# Altium PCB roneCPUBoard-v15a.PcbDoc (part 3 of 3)
Units mil, origin at the board's own origin, x right, y up, seen from the top; angles counter-clockwise.
Board outline 3915.64 x 3915.87 mil, 2 copper layers (Top Layer, Bottom Layer), stack 61.2 mil thick; 219 components, 161 nets, 783 pads, 428 vias.
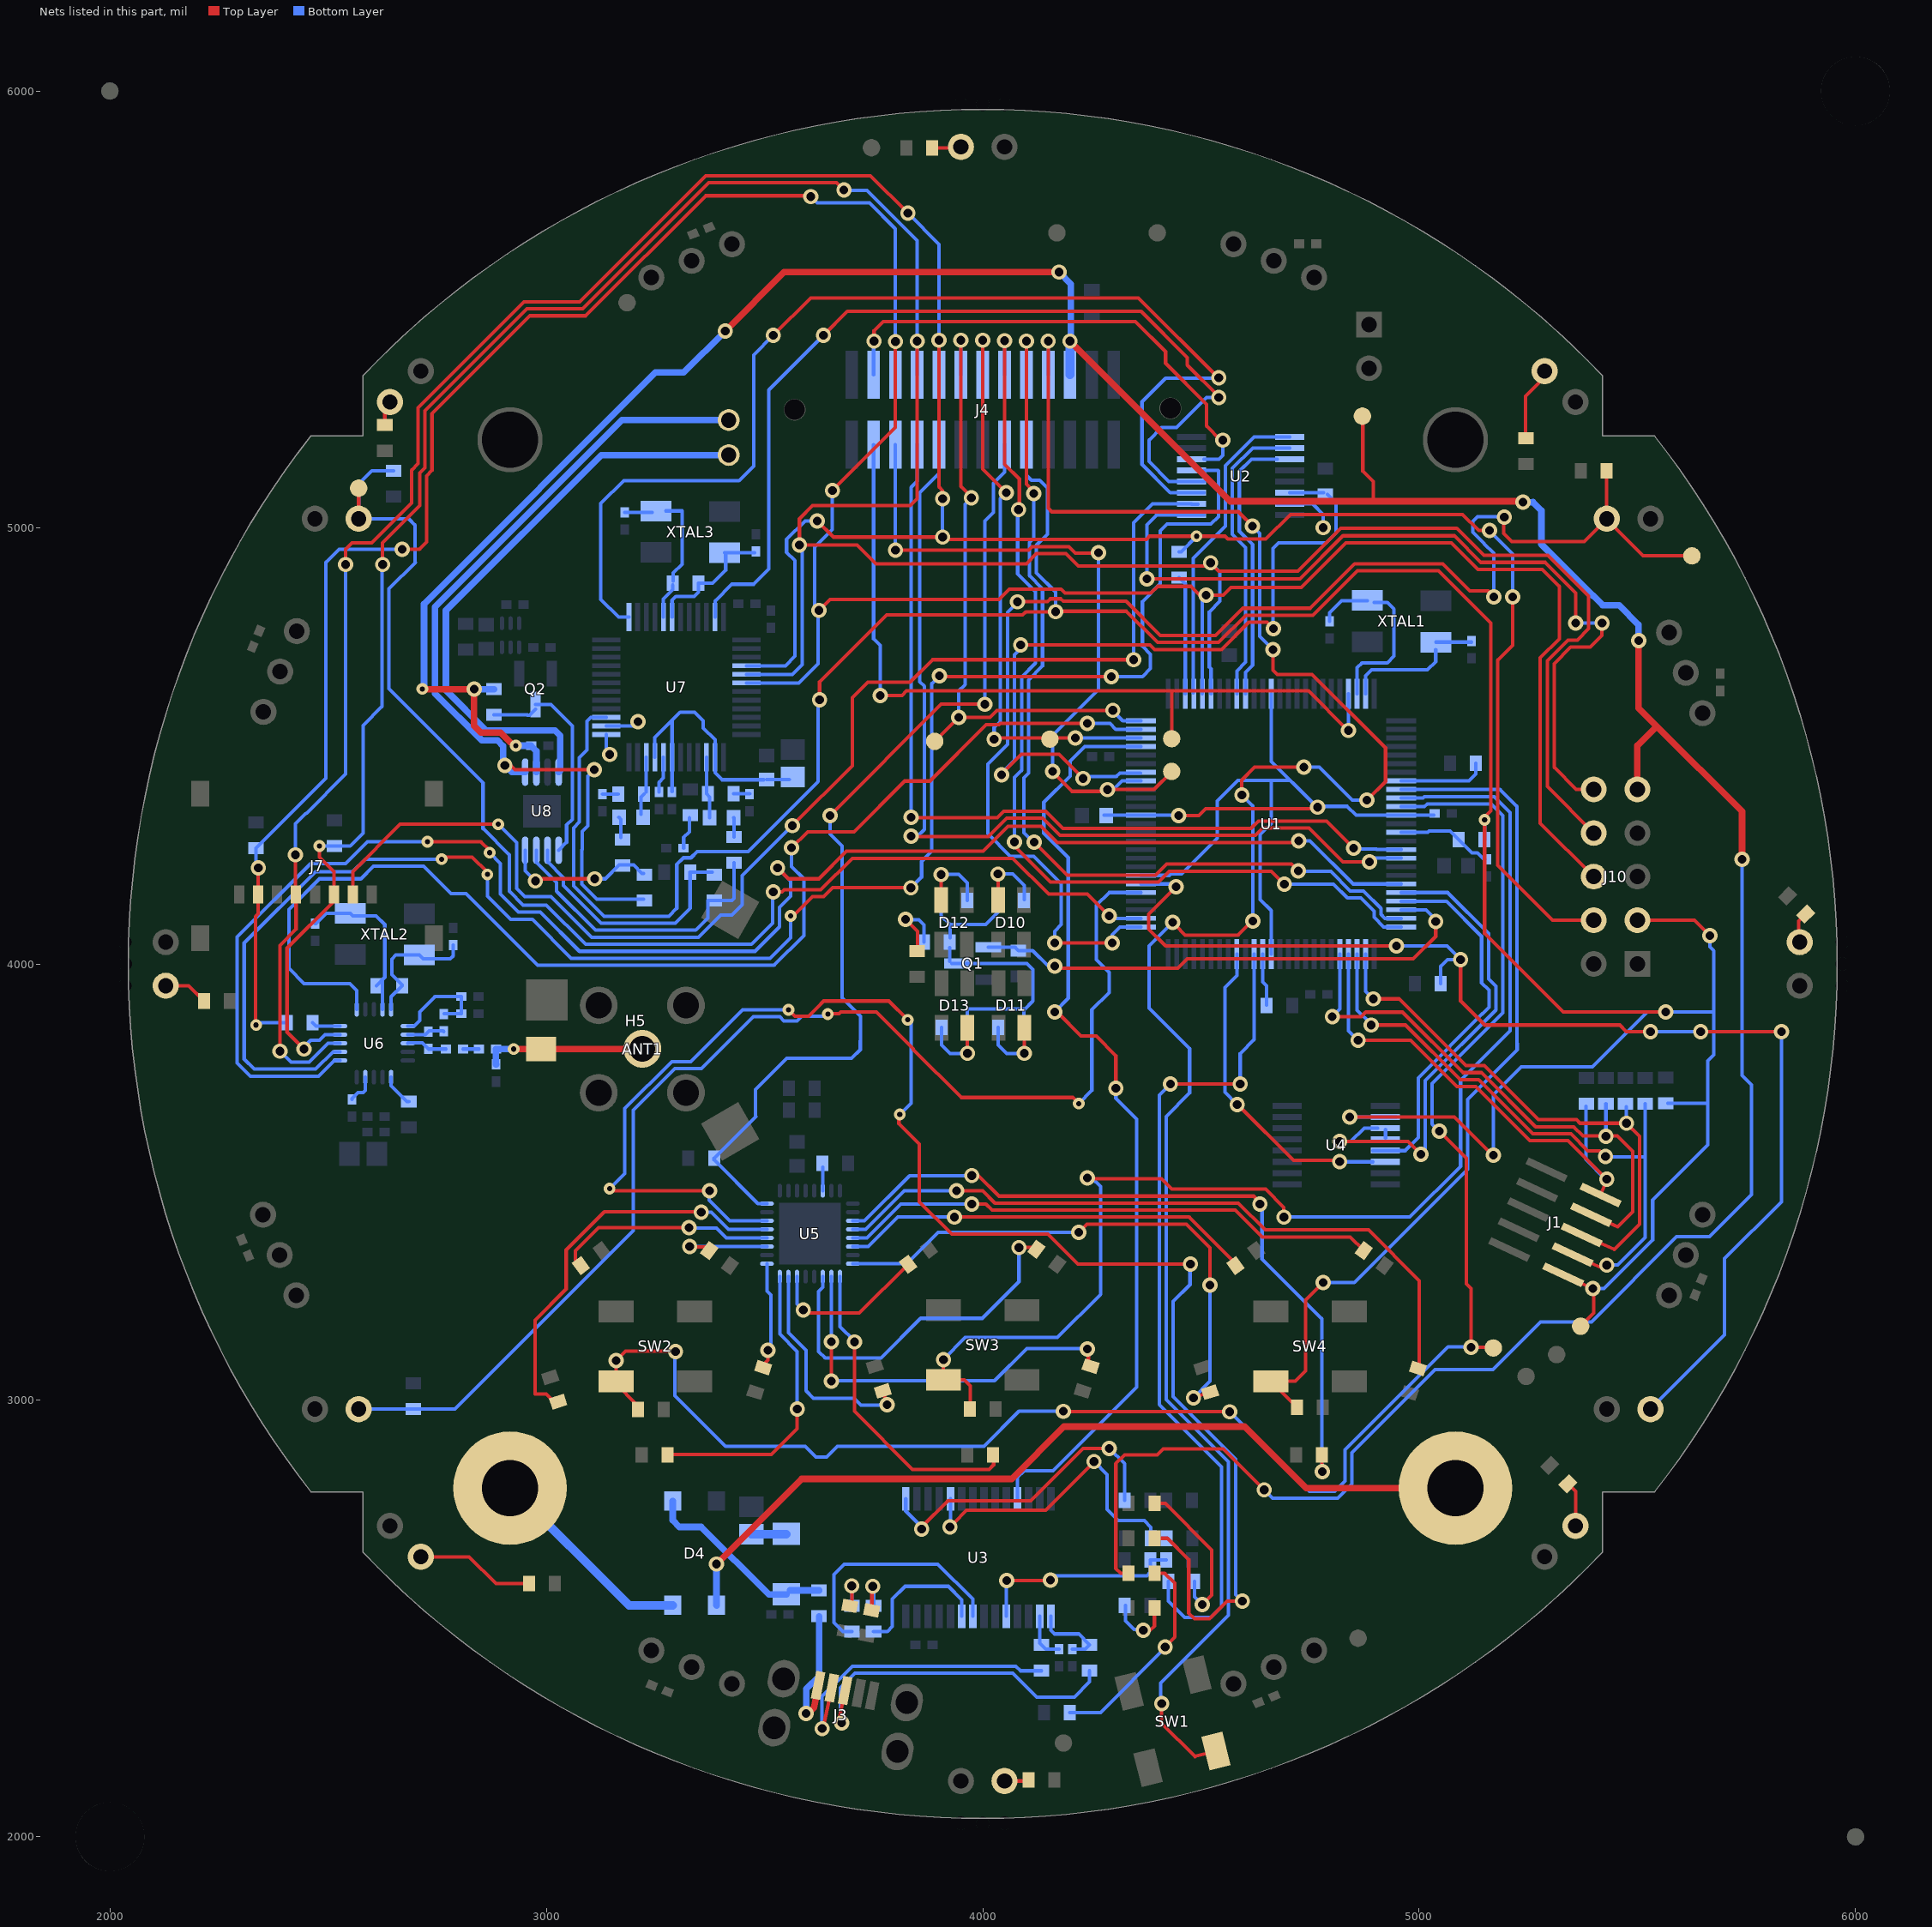
[diagram p3: the nets of this part, all layers, seen from the top]

## Via types
v1: diameter 35, hole 20, Top Layer to Bottom Layer, tented top, 333 vias
v2: diameter 27, hole 12, Top Layer to Bottom Layer, 65 vias
v3: diameter 35, hole 20, Top Layer to Bottom Layer, 14 vias
v4: diameter 25.98, hole 12.99, Top Layer to Bottom Layer, tented top, 13 vias
v5: diameter 25.98, hole 12.99, Top Layer to Bottom Layer, tented both sides, 3 vias

## Nets (pads, with @x,y where several pads share a name; then routed paths per layer and width w, separated by ;. In a path a pad name is that pad's centre, name@x,y a point inside that pad or via, vN(x,y) a via of type N, cw(c..) or ccw(c..) an arc to the next point about the centre after c; other vN are vias at no path point) (continued)
IR_XMIT_CLK: U1.71 U4.11 U4.12 | length 1134
  Top Layer w8: v1(4818,3593) 4975,3593 v1(5004,3564)
  Bottom Layer w8: v1(4818,3593) 4843,3593 4874,3624 U4.11@4905,3624 ; U4.12@4923,3601.13 U4.11@4923,3620.32 ; U1.71@4959.23,4163.52 5065.48,4163.52 5159,4070 5159,3966 5176,3949 5176,3894.37 5014,3732.37 5014,3577 v1@5006,3569
IR_XMIT_DATA: U1.92 U4.14 | length 716.5
  Top Layer w8: v1@4587,3675 4712,3550 v1@4815,3550
  Bottom Layer w8: U1.92@4582.26,4022.77 4582.26,3973.26 4555,3946 4555,3706 v1(4583,3678) ; v1@4824.61,3546.61 U4.14@4893.66,3546.61
  other v1: 4818,3547
IR_XMIT_PWM: U1.72 U4.13 | length 868.6
  Bottom Layer w8: U4.13@4893.66,3572.2 4968.2,3572.2 4998,3602 4998,3739 5144,3885 ; U1.72@4959.23,4143.83 5062.54,4143.83 5143,4063.37 5143,3957 5160,3940 5160,3901 5144.5,3885.5
JTAG_TCK: J1.4 R8.1 U1.80 | length 1287.5
  Top Layer w8: v1(4801,3879) 4867.28,3879 4877.78,3889.5 4962.13,3889.5 5100.63,3751 5142.88,3751 5266.88,3627 5354.25,3627 5375.25,3606 v1@5428,3606 ; J1.4@5394.03,3424.89 5455,3398 5489,3432 5489,3571 5454,3606 v1@5444,3606
  Bottom Layer w8: v1(4801,3879) 4818.48,3896.48 U1.80@4818.48,4022.77 ; v1(5428,3605) R8.1@5428,3679.47
JTAG_TDI: J1.8 R10.1 U1.78 | length 1422.4
  Top Layer w8: v1(4890,3860) 4969,3860 5094,3735 5136.25,3735 5260.25,3611 5347.63,3611 5386.63,3572 5414,3572 v1(5427,3559) ; J1.8@5351.43,3333.54 v1@5420,3303
  Bottom Layer w8: U1.78@4857.85,4022.77 4857.85,3894.15 v1@4890,3862 ; v1@5427,3558 5518,3558 ; v1(5430,3310) 5455,3310 5518,3373 5518,3558 ; R10.1@5518,3679.47 5518,3558
JTAG_TDO: J1.6 R9.1 U1.77 | length 1249.9
  Top Layer w8: v1(4895,3920) 4954.25,3920 5107.25,3767 5149.51,3767 5273.51,3643 5360.88,3643 5368.88,3635 v1@5472,3635 ; J1.6@5372.73,3379.22 5447,3346 5505,3404 5505,3605 v1(5475,3635)
  Bottom Layer w8: U1.77@4877.54,4022.77 4877.54,3937.46 v1(4895,3920) ; v1(5475,3635) R9.1@5475,3673
JTAG_TMS: J1.2 R7.1 U1.79 | length 1129.7
  Top Layer w8: v1(4860,3825) 4980.49,3825 5086.49,3719 5129.63,3719 5253.63,3595 5341,3595 v1@5429,3507 ; J1.2@5415.32,3470.56 v1@5430,3504
  Bottom Layer w8: U1.79@4838.17,4022.77 4838.17,3846.83 v1(4860,3825) ; R7.1@5382,3674 5382,3552 v1@5427,3507
  other v1: 5430,3507
LED_BLUE_0: D15.2 U5.3 | length 1688.7
  Top Layer w8: v1(3975,3515) 3990,3515 4037,3468 4621,3468 v1@4637,3452 ; v1@4777.53,2841.53 D15.2@4777.53,2869
  Bottom Layer w8: U5.3@3702.43,3411.53 3729.02,3411.53 3832.49,3515 v1(3975,3515) ; v1@4640,3438 4640,3324 4777,3187 v1@4777,2837.05
  other v1: 4778,2837 4635,3450
LED_BLUE_1: D16.2 U5.4 | length 1617.6
  Top Layer w8: v1(3940,3480) 4000,3480 4028,3452 4585.63,3452 4647.13,3390.5 4883.8,3390.5 5000,3274.3 D16.2@5000,3075.96
  Bottom Layer w8: U5.4@3702.43,3391.84 3731.96,3391.84 3820.12,3480 v1(3940,3480)
LED_BLUE_2: D17.2 U5.5 | length 1239.6
  Top Layer w8: v1(3975,3450) 4007.37,3450 4021.37,3436 4579,3436 4640.5,3374.5 4841.97,3374.5 D17.2@4873.11,3343.36
  Bottom Layer w8: U5.5@3702.43,3372.16 3734.9,3372.16 3812.75,3450 v1@3967.5,3450
LED_BLUE_3: D18.2 U5.6 | length 925.9
  Top Layer w8: v1@3947.63,3420 4473,3420 D18.2@4572,3321
  Bottom Layer w8: U5.6@3702.43,3352.47 3737.84,3352.47 3805.37,3420 v1(3935,3420)
LED_BLUE_4: D19.2 U5.8 | length 1277.9
  Top Layer w8: v1(4220,3385) 4239,3404 4466.37,3404 4521,3349.37 v1(4521,3264) ; v1@4483,3007 D19.2@4521.12,3018.92
  Bottom Layer w8: U5.8@3702.43,3313.1 3826.1,3313.1 3898,3385 v1(4220,3385) ; v1(4483,3006) 4521,3044 v1(4521,3264)
LED_GREEN_0: D20.2 U5.9 | length 720.5
  Top Layer w8: v1(3706,3134) 3706,2975 3839,2842 4015,2842 4025,2852 D20.2@4025,2874
  Bottom Layer w8: U5.9@3672.9,3283.57 3672.9,3169.1 v1@3706,3136
LED_GREEN_1: D21.2 U5.10 | length 895.1
  Top Layer w8: v1@3653,3045 v1@3653,3134.21 ; D21.2@4242.12,3079.08 v1@4242.12,3118
  Bottom Layer w8: v1@3653,3045 4027,3045 4101,3119 v1@4240,3119 ; v1(3653.21,3134.21) U5.10@3653.21,3283.57
  other v1: 3653,3044 4240,3118
LED_GREEN_2: D22.2 U5.11 | length 819.5
  Top Layer w8: v1@4084,3351 D22.2@4112,3351
  Bottom Layer w8: U5.11@3633.53,3283.57 3633.53,3259.32 3623.71,3249.5 3623.71,3112.29 3639,3097 3767,3097 3858,3188 3999,3188 4083,3272 v1(4083,3350)
LED_GREEN_3: D23.2 U5.14 | length 363.2
  Top Layer w8: v1@3595,3200 3717.47,3200 D23.2@3829.11,3311.64
  Bottom Layer w8: U5.14@3574.47,3283.57 3574.47,3220.53 v1@3588.5,3206.5
  other v1: 3589,3207
LED_GREEN_4: D24.2 U5.15 | length 510.5
  Top Layer w8: D24.2@3771,3021 v1(3781,2990)
  Bottom Layer w8: U5.15@3554.79,3283.57 3554.79,3154.84 3595,3114.63 3595,3022 3612,3005 3705,3005 3721,2989 v1@3781,2989
LED_HEARTBEAT: R5.2 U1.90 | length 1931.1
  Top Layer w8: v1(4430,3725) v1(4590,3725)
  Bottom Layer w8: R5.2@4425,2585 4425,2540 4462.5,2502.5 4522.5,2502.5 4547,2527 4547,2848 4404.5,2990.5 4404.5,3699.5 v1(4430,3725) ; v1(4590,3725) 4590,3795 4621.63,3826.63 U1.90@4621.63,4022.77
LED_IR_BEACON: Q1.1 R33.2 U1.73 | length 1202.7
  Top Layer w8: v1@4165,4000 4175,3990 4447.37,3990 4468.87,4011.5 4986.5,4011.5 5037.93,4062.93 v1(5037.93,4097.07)
  Bottom Layer w8: Q1.1@4012.43,4038.4 4074.13,4038.4 R33.2@4082,4030.53 4114.47,4030.53 4150,3995 v1(4165,3995) ; U1.73@4959.23,4124.15 5015.85,4124.15 v1@5040,4100
LED_MSP430: D26.2 U5.22 | length 3725.8
  Top Layer w8: v2(3145,3485) 3150,3480 v1(3374,3480) ; v2(3555,3895) 3570,3880 3601.06,3880 3620.5,3899.44 3620.5,3900 3635.5,3915 3785,3915 v2(3828.09,3871.91) ; v2(3810,3655) 3808,3655 3808,3634 3855,3587 3855,3455 3929.21,3380.79 4149.21,3380.79 4218,3312 v1(4476,3312) ; D26.2@4393.53,2684 4423,2684 4472,2635 4472,2513 4485,2500 4520,2500 4560,2540 v1(4595,2540)
  Bottom Layer w8: v2(3145,3485) 3180,3520 3180,3668.63 3287.68,3776.31 3331.31,3776.31 3450,3895 v2(3555,3895) ; v1@3373,3477 3373,3459 3420.47,3411.53 U5.22@3505.57,3411.53 ; v2(3810,3655) 3835.6,3680.6 3835.6,3864.4 v2(3828.09,3871.91) ; v1@4475,3306 4475,3265 4436.5,3226.5 4436.5,3008.5 4580,2865 4580,2555 v1(4595,2540)
LED_RED_0: D25.2 U5.16 | length 687
  Top Layer w8: D25.2@3277.53,2876 3516,2876 3575,2935 v1(3575,2980)
  Bottom Layer w8: U5.16@3535.1,3283.57 3535.1,3151.9 3575,3112 v1(3575,2980)
LED_RED_1: D27.2 U5.17 | length 238
  Top Layer w8: D27.2@3494.1,3078.1 3508,3092 v1(3508,3115)
  Bottom Layer w8: U5.17@3505.57,3313.1 3505.57,3250.15 3514.5,3241.22 v1@3514.5,3121.5
LED_RED_2: D28.2 U5.19 | length 213.3
  Top Layer w8: v1@3340.47,3352 3364.47,3352 D28.2@3373.11,3343.36
  Bottom Layer w8: v1(3328.53,3352.47) U5.19@3505.57,3352.47
LED_RED_3: D29.2 U5.20 | length 507.4
  Top Layer w8: D29.2@3079.11,3308.64 3067,3320.76 3067,3343 3120,3396 v1@3326,3396
  Bottom Layer w8: v1@3328,3395 3390,3395 3412.84,3372.16 U5.20@3505.57,3372.16
  other v1: 3327,3396
LED_RED_4: D30.2 U5.21 | length 929.1
  Top Layer w8: D30.2@3021,2994 3000,3015 2974,3015 2974,3184 3045.55,3255.55 3045.55,3344.55 3133,3432 v1@3357,3432
  Bottom Layer w8: v1(3355,3431) 3378.37,3431 3417.37,3392 U5.21@3505.42,3392
LED_RESET: J4.16 R34.1 U5.24 | length 2281.5
  Top Layer w8: v1(3650,4340) 3905,4595 v1(4005,4595)
  Bottom Layer w8: U5.24@3505.57,3450.9 3484.69,3450.9 3384.53,3551.06 R34.1@3384.53,3555 3385,3555 3480,3650 3479.5,3650.5 3479.5,3712.46 3551.04,3784 3699.71,3784 3719.53,3803.82 3719.53,3823.44 3720,3823.91 3720,3880 3678,3922 3678,4270 3650,4298 v1(3650,4340) ; v1(4005,4595) 4005,5015 4024.5,5034.5 4024.5,5101.22 4050,5126.72 J4.16@4050,5189.98
LEFT: C44.2 R57.1 U7.46 | length 128.6
  Bottom Layer w8: C44.2@3217,4342.56 3217,4382.47 R57.1@3223.53,4389 ; R57.1@3229.1,4394.1 U7.46@3229.1,4473.57
LEFT_OUT: C44.1 R53.1 | length 48.4
  Bottom Layer w8: C44.1@3166.44,4336 3171,4331.44 R53.1@3171,4289.53
LIGHT_BL: R40.1 R41.1 U1.5 | length 2904
  Top Layer w8: v2(3645,3885) 3646,3886 3671,3886 3675,3890 3756.63,3890 3841,3805.63 3841,3803.75 3950.75,3694 4206,3694 v2(4220,3680)
  Bottom Layer w8: R41.1@2570,2980 R40.1@2695,2980 ; R40.1@2695,2980.47 2790.47,2980.47 3199,3389 3199,3665 3294.31,3760.31 3355.31,3760.31 3474,3879 3534.94,3879 3544.44,3869.5 3574.5,3869.5 3585,3880 3650,3880 v2(3645,3885) ; v2(4220,3680) 4250,3710 4250,3895 4289.5,3934.5 4289.5,3980.78 4260.5,4009.78 4260.5,4134.5 4289.52,4163.52 U1.5@4362.77,4163.52
LIGHT_BR: R42.1 R43.1 U1.6 | length 2880.8
  Top Layer w8: v1(4443,4177) 4380,4114 4380,4080 4419,4041 v1(4948,4041) ; v1(5095,4010) 5095,3915 5150,3860 5460,3860 5475,3845 v1(5530,3845) ; v1(5645,3845) v1(5830,3845)
  Bottom Layer w8: U1.6@4362.77,4183.2 v1@4436.8,4183.2 ; v1(4948,4041) 5064,4041 v1(5095,4010) 5065,4010 5049.53,3994.53 R42.1@5049.53,3955 ; R43.1@5530,2980 5700,3150 5700,3325 5830,3455 v1(5830,3845) ; v1(5530,3845) v1(5645,3845)
LIGHT_FL: R36.1 R37.1 T_FL1.1 U1.2 | length 3025.4
  Top Layer w8: R37.1@2570,5020 T_FL1.1@2570,5090 ; v3(3520,4165) 3540,4165 3545,4170 3629,4170 3701,4242 4069,4242 4151,4160 4240,4160 v1(4290,4110)
  Bottom Layer w8: R36.1@2650,5129.53 2600.47,5129.53 2570,5099.06 R37.1@2570,5020 2685,5020 2699.5,5005.5 2699.5,4920.5 2700,4920 2639.5,4859.5 2639.5,4630.5 2855,4415 2855,4310 2915,4250 2915,4166.56 2946.56,4135 3000,4135 3090,4045 3470,4045 3518.5,4093.5 3518.5,4163.5 v3(3520,4165) ; v1@4295.54,4104.46 U1.2@4362.77,4104.46
LIGHT_FR: R38.1 R39.1 T_FR1.1 U1.1 | length 3281
  Top Layer w8: v1@4080,4830 4148.28,4830 4154.78,4836.5 4179.22,4836.5 4184.72,4831 4328.63,4831 4407.13,4752.5 4533.87,4752.5 4596.37,4815 4750.23,4815 4852.23,4917 5054,4917 5116,4855 5158,4855 v1@5171,4842 ; v1(4165,4048) v1(4297,4048) ; v1@5194,5024 5194,4986 5212,4968 5378,4968 R39.1@5429,5019 ; R38.1@5429.53,5130 5429.53,5019.53 R39.1@5429,5019 ; T_FR1.1@5625,4935 5513,4935 R39.1@5429,5019
  Bottom Layer w8: v1@4080,4829 4057,4806 4057,4503 4012,4458 4012,4298.28 4063.28,4247 4117,4247 4180,4184 4180,4090 4165,4075 v1(4165,4048) ; v1(4297,4048) 4297,4067 4314.78,4084.78 U1.1@4362.77,4084.78 ; 5148.78,4963.22 5171,4941 v1(5171,4841) ; 5148.78,4963.5 5123,4989.28 5123,5014 5134,5025 v1@5195,5025
  other v1: 4079.5,4829.5 5195,5024
MICN: U7.2 | length 76.4
  Bottom Layer w8: U7.2@3137.57,4545.42 3200.42,4545.42 v1(3210,4555)
MICP: U7.1 | length 48.8
  Bottom Layer w8: U7.1@3137.57,4525.73 3137.57,4487.43 v1(3145,4480)
MOT0_PWMA: J4.4 T_PWM1.1 U1.47 | length 1886
  Top Layer w8: v1(3765,4615) 3815,4615 3825.5,4625.5 4746.5,4625.5 v1@4836.5,4535.5 ; T_PWM1.1@4433,4516 4433,4623.5
  Bottom Layer w8: J4.4@3750,5189.98 3750,4745 3765,4730 v1(3765,4615) ; v1@4838.17,4535 U1.47@4838.17,4619.23
  other v1: 4838,4535
MOT0_PWMB: J4.6 T_PWM2.1 U1.18 | length 1639.5
  Top Layer w8: v1(3800,4948) 4105,4948 4113,4956 4197.35,4956 4212.35,4941 v1@4259,4941 ; v1@4160,4440 4204.5,4395.5 v1@4282,4395.5 ; v1(4286,4399.5) 4392.5,4399.5 T_PWM2.1@4433,4440
  Bottom Layer w8: v1(3800,4948) J4.6@3800,5189.98 ; v1(4160,4441) 4160,4524 4265,4629 v1@4265,4938 ; v1@4286.5,4400 4299.63,4400 4319.05,4419.43 U1.18@4362.77,4419.43
  other v1: 4265,4942
MOT1_PWMA: J4.8 U1.66 | length 2027.7
  Top Layer w8: v1@3837,4335 4033.03,4335 4048.03,4350 4144.25,4350 4183.75,4310.5 4614.5,4310.5 4631.5,4327.5 4787.5,4327.5 v1(4850,4265)
  Bottom Layer w8: v1@3836,4345 3836,5092 3850,5106 J4.8@3850,5189.98 ; v1@4851.5,4263.5 4901.5,4263.5 4903.06,4261.94 U1.66@4959.23,4261.94
  other v1: 3836,4336
MOT1_PWMB: J4.10 U1.67 | length 2113.8
  Top Layer w8: v1@3836,4292 4012.65,4292 4054.65,4334 4137.63,4334 4177.13,4294.5 4624.5,4294.5 4641.5,4311.5 4747.5,4311.5 4825,4234 v1(4886,4234)
  Bottom Layer w8: v1@3851,4293 3866,4308 3866,4636.19 3855.5,4646.69 3855.5,5079.5 3900,5124 J4.10@3900,5189.98 ; v1@4894.26,4242.26 U1.67@4959.23,4242.26
  other v1: 3836,4293
NetANT1_1: ANT1.1 C27.1 C28.2 H5.1 | length 371
  Top Layer w15: v2(2925,3805) H5.1@2988.39,3805 3219.66,3805 ANT1.1@3220.06,3805.4
  Bottom Layer w15: C28.2@2885,3769.69 2884.68,3770 C27.1@2884.68,3805 v2(2925,3805)
NetC1_2: C1.2 U1.48 XTAL1.1 | length 431.6
  Bottom Layer w8: C1.2@4795,4784.69 4795,4805 4822,4832 XTAL1.1@4881.26,4832 ; U1.48@4857.85,4619.23 4857.85,4678.85 4869,4690 4927,4690 4942,4705 4942,4813 4927,4828 XTAL1.1@4897,4828
NetC2_2: C2.2 U1.49 XTAL1.3 | length 323.5
  Bottom Layer w8: U1.49@4877.54,4619.23 4877.54,4660.54 4891,4674 5019,4674 5038,4693 XTAL1.3@5038,4720 ; XTAL1.3@5038.74,4737.26 C2.2@5120,4737.26
NetC22_2: C22.2 R48.1 U6.9 XTAL2.1 | length 397.2
  Bottom Layer w8: C22.2@2470,4092.28 2472.28,4092.28 2495.93,4115.93 XTAL2.1@2551.26,4115.93 2557.19,4110 2610,4110 2630,4090 2630,3969.53 R48.1@2610.47,3950 ; U6.9@2624.68,3895.95 2624.68,3964.53
NetC23_2: C23.2 U6.19 | length 70.1
  Bottom Layer w8: C23.2@2555,3689.69 2555,3691.65 2568.78,3705.43 2580.43,3705.43 2585.31,3710.31 U6.19@2585.31,3740.43
NetC24_2: C24.2 R48.2 U6.10 XTAL2.3 | length 311.8
  Bottom Layer w8: U6.10@2644.37,3895.95 2644.37,3924.84 R48.2@2669.53,3950 2669.53,3952.13 2646,3975.65 2646,4011 2655.44,4020.44 XTAL2.3@2708.74,4020.44 2717.81,4011.38 2780,4011.38 2786.81,4018.19 C24.2@2786.81,4043.5
NetC25_2: C25.2 C26.2 L4.2 U6.11 | length 240.6
  Bottom Layer w8: U6.11@2682.76,3857.56 2697.44,3857.56 2710,3870.12 2710,3890 2745,3925 C26.2@2805.31,3925 C25.2@2805.31,3885.79 L4.2@2766.1,3885.79
NetC27_2: C27.2 L3.2 | length 35.6
  Bottom Layer w8: L3.2@2809.69,3805 C27.2@2845.31,3805
NetC29_1: C29.1 R49.2 U7.18 XTAL3.1 | length 304.3
  Bottom Layer w8: U7.18@3288.16,4794.43 3288.16,4833.16 3297,4842 3339,4842 3348.53,4851.53 R49.2@3348.53,4872 3381,4872 3411,4902 XTAL3.1@3411,4936 ; XTAL3.1@3408.74,4942.26 C29.1@3476.94,4942.26
NetC30_1: C30.1 R49.1 U7.17 XTAL3.3 | length 351.5
  Bottom Layer w8: C30.1@3180,5034.68 XTAL3.3@3242.68,5034.68 ; U7.17@3268.47,4794.43 3268.47,4836.1 3290,4857.63 R49.1@3290,4868 ; XTAL3.3@3274,5038 3311,5038 3311,4916 3291,4896 R49.1@3291,4877
NetC37_2: C37.2 U7.44 | length 84.2
  Bottom Layer w8: C37.2@3258,4393.69 3258,4416 3268.47,4426.47 U7.44@3268.47,4473.57
NetC38_1: C38.1 R54.2 | length 75
  Bottom Layer w8: C38.1@3314.69,4265 3314.69,4289.69 3328,4303 R54.2@3328,4334.47
NetC39_1: C39.1 R55.2 | length 36.5
  Bottom Layer w8: R55.2@3429.53,4390 C39.1@3466,4390
NetC40_1: C40.1 R57.2 | length 35.5
  Bottom Layer w8: C40.1@3129,4389 R57.2@3164.47,4389
NetC41_2: C41.2 R56.2 U8.2 | length 569
  Bottom Layer w8: U8.2@3002.8,4260.43 3002.8,4234.46 3039.5,4197.75 3039.5,4179.53 3125.74,4093.28 3295.28,4093.28 3329.53,4127.53 C41.2@3329.53,4210 R56.2@3380,4210
NetC45_2: C45.2 R63.2 U1.64 | length 218.9
  Bottom Layer w8: U1.64@4959.23,4301.31 5019.6,4301.31 5022.78,4304.5 5070.97,4304.5 R63.2@5090.47,4285 5120.76,4254.72 5133.28,4254.72 5148.31,4239.69 C45.2@5150,4239.69
NetC47_2: C47.2 R58.1 U3.15 | length 179.3
  Bottom Layer w8: U3.15@4156.34,2505.55 4156.34,2473.19 4164.53,2465 4220,2465 4245,2440 R58.1@4245,2439.53 4235.16,2429.69 C47.2@4205,2429.69
NetC48_2: C48.2 R59.1 U3.16 | length 111.9
  Bottom Layer w8: U3.16@4130.75,2505.55 4130.75,2443.78 R59.1@4135,2439.53 4144.84,2429.69 C48.2@4175,2429.69
NetD1_2: D1.2 R5.1 | length 370.6
  Top Layer w8: D1.2@4393.53,2764 4418.37,2764 4525,2657.37 4525,2554 v1(4503,2532)
  Bottom Layer w8: R5.1@4485,2585 4485,2550 v1(4503,2532)
NetD2_2: D2.2 R13.2 | length 480
  Top Layer w8: D2.2@4393.53,2604 4417,2604 4440,2581 4440,2458 v1@4425,2443
  Bottom Layer w8: R13.2@4199.53,2285 4270,2285 v1@4418,2433
  other v1: 4418,2435
NetD3_2: D3.2 R12.2 | length 152.7
  Top Layer w8: v1(4368.02,2473.02) 4383.02,2473.02 4393.53,2483.53 D3.2@4393.53,2524
  Bottom Layer w8: R12.2@4327,2530 4327,2495 4347,2475 v1@4366.03,2475
NetD4_1: D4.1 F1.2 R14.2 | length 441.8
  Bottom Layer w15: D4.1@3289.8,2769.68 3289.8,2725.2 3305,2710 3355,2710 3510,2555 F1.2@3550,2555 ; F1.2@3558.43,2564.53 R14.2@3625,2564.53
NetD5_2: D5.2 R15.2 U3.19 | length 480.6
  Top Layer w8: v1(4055,2587) v1@4155,2587
  Bottom Layer w8: U3.19@4053.98,2505.55 v1@4053.98,2585.98 ; v1(4155,2588) 4165,2598 4376,2598 4384.53,2606.53 R15.2@4384.53,2634 ; R15.2@4385,2634 D5.2@4420.47,2634
NetD6_1: D6.1 U3.1 | length 717.6
  Top Layer w8: v1@3860,2710 3920,2770 4110,2770 4230,2890 v1(4290,2890)
  Bottom Layer w8: U3.1@3823.66,2774.45 3823.66,2746.34 v1@3860,2710 ; v1(4290,2890) 4325,2855 D6.1@4325,2771
  other v1: 3860,2705
NetD7_2: D7.2 R18.2 U3.5 | length 734.1
  Top Layer w8: v1@3934,2719 3963,2748 4144,2748 v1@4255,2859
  Bottom Layer w8: v1@3926.02,2718.98 U3.5@3926.02,2774.45 ; v1(4255,2860) 4285,2830 4285,2750 4310,2725 4370,2725 4385.53,2709.47 R18.2@4385.53,2684 ; R18.2@4387,2684 D7.2@4421.47,2684
  other v1: 3925,2710
NetD8_2: D8.2 R16.2 | length 96.5
  Top Layer w8: D8.2@3746,2519 v1@3746,2574
  Bottom Layer w8: R16.2@3750,2529.53 v1@3750,2571
  other v1: 3748,2574
NetD9_2: D9.2 R17.2 | length 87.5
  Top Layer w8: D9.2@3700,2533 v1(3700,2575)
  Bottom Layer w8: R17.2@3700,2529.53 v1(3700,2575)
NetD10_1: D10.1 R29.2 | length 163.6
  Top Layer w8: D10.1@4035,4146.18 v1(4035,4206)
  Bottom Layer w8: v1(4035,4206) 4069,4206 4095,4180 R29.2@4095,4147
NetD11_1: D11.1 R30.2 | length 166.9
  Top Layer w8: v1(4095,3795) D11.1@4095,3853.82
  Bottom Layer w8: R30.2@4035.47,3855 4035.47,3814.53 4055,3795 v1(4095,3795)
NetD12_1: D12.1 R31.2 | length 166.9
  Top Layer w8: D12.1@3905,4146.18 v1(3905,4205)
  Bottom Layer w8: v1(3905,4205) 3945,4205 3964.53,4185.47 R31.2@3964.53,4145
NetD13_1: D13.1 R28.2 | length 166.9
  Top Layer w8: v1(3965,3795) D13.1@3965,3853.82
  Bottom Layer w8: R28.2@3905.47,3855 3905.47,3814.53 3925,3795 v1(3965,3795)
NetD14_2: D14.2 R32.2 | length 168.6
  Top Layer w8: v1@3823.5,4102.5 3851,4075 D14.2@3851,4032
  Bottom Layer w8: v1@3823,4101 3854,4101 3865.47,4089.53 R32.2@3865.47,4050
  other v1: 3823,4102
NetF1_1: F1.1 L1.1 | length 80
  Bottom Layer w20: L1.1@3470,2693.5 F1.1@3550,2693.5
NetJ3_1: J3.1 R14.1 | length 299.4
  Top Layer w15: v1@3601,2284 3613,2296 J3.1@3623.14,2346.91
  Bottom Layer w15: v1@3596,2287 3596,2339.04 3625,2368.04 R14.1@3625,2505.47
  other v1: 3595,2283
NetJ11_1: J11.1 R60.1 U8.5 | length 1991.9
  Top Layer w8: v1(2905,4455) 2918.07,4455 2928.07,4445 v1(3110,4445)
  Bottom Layer w8: v1(3110,4445) 3095.03,4430.03 3095.03,4316.7 3082,4303.67 3082,4262 3081.5,4261.5 3081.5,4182.78 3115.81,4148.47 R60.1@3223,4148.47
  Bottom Layer w15: U8.5@2951.61,4439.57 2920.43,4439.57 v1(2905,4455) 2901,4459 2901,4499 2888,4512 2852.53,4512 2745,4619.53 2745,4817.53 3173.47,5246 J11.1@3418,5246
NetJ11_2: J11.2 U8.8 | length 1368.4
  Bottom Layer w15: U8.8@3028.39,4439.57 3032,4443.18 3032,4523 3020,4535 2862.06,4535 2770,4627.06 2770,4810 3126,5166 J11.2@3418,5166
NetL2_1: L2.1 L4.1 U6.12 | length 86.4
  Bottom Layer w8: U6.12@2682.76,3837.87 2723.19,3837.87 L2.1@2730,3844.68 2731.97,3846.65 2763.66,3846.65 L4.1@2765,3845.31
NetL2_2: L2.2 L3.1 U6.13 | length 93.8
  Bottom Layer w8: U6.13@2682.76,3818.19 2683.66,3819.09 2716.22,3819.09 L2.2@2730,3805.31 2730.31,3805 L3.1@2770.31,3805
NetQ1_3: Q1.3 R28.1 R29.1 R30.1 R31.1 R32.1 | length 779.6
  Bottom Layer w8: R31.1@3905,4145 3905,4110 3925,4090 ; Q1.3@3924,4006 R32.1@3924,4037 ; R32.1@3925,4059.53 3925,4090 ; Q1.3@3929,4001 Q1.3@3941.57,4001 4100.94,4001 4115,3986.94 4115,3915 4095,3895 ; R28.1@3964.53,3855 3964.53,3897 4094.53,3897 R30.1@4094.53,3855 ; R29.1@4035.47,4145 4035.47,4118.47 4007,4090 3925,4090
NetQ2_3: Q2.3 R51.1 U8.1 | length 503.5
  Bottom Layer w8: R51.1@2880,4570.47 2956.34,4570.47 2956.81,4570 2961.81,4570 Q2.3@2975,4583.19 ; Q2.3@2975,4594.57 3010.43,4594.57 3059.53,4545.47 3059.53,4331.4 3046.5,4318.37 3046.5,4278.55 U8.1@3028.39,4260.43
NetR3_1: R3.1 U1.58 | length 202.2
  Bottom Layer w8: U1.58@4959.23,4419.43 5114.43,4419.43 5130,4435 R3.1@5130,4460
NetR4_2: R4.2 U1.89 | length 120.9
  Bottom Layer w8: U1.89@4641.31,4022.77 4641.31,3958.68 4650,3950 R4.2@4650,3905.47
NetR16_1: R16.1 U3.23 | length 331.9
  Bottom Layer w8: R16.1@3750,2470.47 3781.47,2470.47 3793,2482 3793,2545 3822,2574 3921,2574 3951.61,2543.39 U3.23@3951.61,2505.55
NetR17_1: R17.1 U3.22 | length 560.2
  Bottom Layer w8: R17.1@3700,2470.47 3679.53,2470.47 3659,2491 3659,2601 3683,2625 3897.2,2625 3977.2,2545 U3.22@3977.2,2505.55
NetR20_1: R20.1 T0.1 | length 76.5
  Top Layer w8: R20.1@3884.53,5870 3950,5870 T0.1@3961,5870
NetR21_1: R21.1 T1.1 | length 42.5
  Top Layer w8: R21.1@2630,5234.53 T1.1@2630,5277
NetR22_1: R22.1 T2.1 | length 102
  Top Layer w8: T2.1@2128,3950 2180.47,3950 R22.1@2215.47,3915
NetR23_1: R23.1 T3.1 | length 273.6
  Top Layer w8: T3.1@2712.36,2641.64 2823.36,2641.64 2885,2580 R23.1@2960.47,2580
NetR24_1: R24.1 T4.1 | length 53.5
  Top Layer w8: T4.1@4050,2128 R24.1@4103.47,2128
NetR25_1: R25.1 T5.1 | length 104
  Top Layer w8: R25.1@5340.88,2809.12 5358.36,2791.64 T5.1@5358.36,2712.36
NetR26_1: R26.1 T6.1 | length 68.7
  Top Layer w8: T6.1@5870,4052 5870,4098.24 R26.1@5885.88,4114.12
NetR27_1: R27.1 T7.1 | length 156.1
  Top Layer w8: R27.1@5244.12,5205.41 5244.12,5300.88 T7.1@5287,5343.76
NetR35_2: R35.2 U5.30 | length 54.1
  Bottom Layer w8: U5.30@3633.53,3480.43 R35.2@3633.53,3534.53
NetR47_2: R47.2 U6.16 | length 75.4
  Bottom Layer w8: U6.16@2644.37,3740.43 2644.37,3720.63 2680.47,3684.53 R47.2@2685,3684.53
NetR52_2: R52.2 R56.1 U8.3 | length 691.6
  Bottom Layer w8: U8.3@2977.2,4260.43 2977.2,4232.8 3023.5,4186.5 3023.5,4166.5 3112.72,4077.28 3342.28,4077.28 3370,4105 3370,4145.47 3425,4145.47 3430,4150.47 R52.2@3430,4231.47
NetR53_2: R53.2 R60.2 U8.4 | length 344.1
  Top Layer w8: v1@2980,4195 v1(3111,4195)
  Bottom Layer w8: U8.4@2951.61,4260.43 2951.61,4213.39 v1(2975,4190) ; v1(3111,4195) 3135.53,4195 3167.06,4226.54 3200.05,4226.54 3219.06,4207.53 R60.2@3223,4207.53
NetR64_2: R64.2 U1.28 | length 272.1
  Bottom Layer w8: R64.2@4450,4885.47 4464.15,4871.32 U1.28@4464.15,4619.23
NetR67_1: R67.1 U6.5 | length 65.8
  Bottom Layer w8: R67.1@2464.53,3865 2471.97,3857.56 U6.5@2527.24,3857.56
POWER_BUTTON: J4.19 SW1.3 | length 4821.1
  Top Layer w8: v1(4150,5427) 4150,5044 4158,5036 4586,5036 v1@4623,4999 ; v1(4410,2305) 4410,2260 4486,2184 SW1.3@4534,2196 ; v1@4442,4088 4464,4066 4585,4066 v1@4617,4098 ; v1@4593,4387 4593,4421 4623,4451 v1(4736,4451) ; v1(4665,4720) 4665,4673 4675,4663 4754.75,4663 4923,4494.75 4923,4418 v1@4881,4376
  Bottom Layer w8: J4.19@4150,5350.02 v1(4150,5427) ; v1@4407.5,2307.5 4407.5,2352.5 4563,2508 4563,2859.37 4420.5,3001.87 4420.5,3650.5 4474,3704 4474,3806 4381,3899 4381,4041 v1@4432.5,4092.5 ; v1(4594,4387) 4619,4362 v1@4619,4100 ; v1(4618,5003) 4634.5,4986.5 4634.5,4750.5 v1(4665,4720) ; v1(4736,4451) 4771,4451 4847,4375 v1(4880,4375)
  other v1: 4435,4095 4619,4098
PRONG1: D4.3 J2.1 | length 481.5
  Bottom Layer w20: J2.1@2920,2800 3189.68,2530.32 D4.3@3289.8,2530.32
PRONG2: D4.4 J5.1 | length 1976.6
  Top Layer w15: v1(3390,2625) 3585,2820 4066,2820 4186,2940 4600,2940 4741,2799 J5.1@5083,2799
  Bottom Layer w15: v1(3390,2625) 3390,2530.51 D4.4@3390.2,2530.32
QEI_0A: J4.11 T_QEI1.1 U1.25 | length 1478.8
  Top Layer w8: T_QEI1.1@3890,4510 v1(3945,4565) 4016.72,4565 4032.72,4581 v1(4298,4581) ; v1(3950,5429) 3950,5094 v1@3974,5070
  Bottom Layer w8: v1(3945,4565) 3945,4625.5 3959.5,4640 3959.5,5053.5 v1(3974,5068) ; J4.11@3950,5350.02 v1(3950,5429) ; v1@4295,4583 4320.78,4557.22 U1.25@4362.77,4557.22
QEI_0B: J4.13 T_QEI2.1 U1.23 | length 1354.6
  Top Layer w8: v1(4000,5429) 4000,5134 v1(4054,5080) ; v1@4030,4518 v1(4212,4518)
  Bottom Layer w8: J4.13@4000,5350.02 v1(4000,5429) ; v1@4026,4519 4026,4541 4040.5,4555.5 4040.5,5066.5 v1(4054,5080) ; v1@4213.15,4517.85 U1.23@4362.77,4517.85
  other v1: 4026,4515
QEI_1A: J4.15 U1.75 | length 2244.3
  Top Layer w8: v1(4050,5428) 4050,5145 4084,5111 4084,5067.28 v1@4084,5054 ; v1@4072.5,4270.5 4155.5,4187.5 4402.78,4187.5 4427.78,4212.5 4661.5,4212.5 v1(4691,4183)
  Bottom Layer w8: J4.15@4050,5350.02 v1(4050,5428) ; v1@4073,4289 4073,4427.63 4089,4443.63 4089,4657.2 4121,4689.2 4121,4853 4080,4894 v1@4080,5038 ; v1(4691,4183) 4803.75,4183 4835.54,4151.2 4866.17,4151.2 4896.78,4120.59 4896.78,4106.84 4918.84,4084.78 U1.75@4959.23,4084.78
  other v1: 4072.5,4279.5 4082,5041
QEI_1B: J4.17 U1.74 | length 2210.2
  Top Layer w8: v1(4100,5427) 4100,5099.35 v1@4114,5085.35 ; v1(4118,4279) 4193.5,4203.5 4396.15,4203.5 4421.15,4228.5 4707.5,4228.5 v1(4723,4213)
  Bottom Layer w8: J4.17@4100,5350.02 v1(4100,5427) ; v1@4117,4278 4094,4301 4094,4426 4105,4437 4105,4650.58 4137,4682.58 4137,4859.63 4107,4889.63 4107,4966 4117,4976 v1(4117,5078) ; v1@4723,4212 4797.37,4212 4842.17,4167.2 4872.8,4167.2 4912.78,4127.22 4912.78,4113.47 4921.79,4104.46 U1.74@4959.23,4104.46
RADIO_CE: U1.70 U6.1 | length 3746.1
  Top Layer w8: v2(2727.72,4280) 2850,4280 2870,4260 v2(2870,4255) ; v3(3530,4220) 3555,4195 3625,4195 3688,4258 4001.28,4258 4058.28,4315 4134,4315 4171,4278 v1@4711,4278
  Bottom Layer w8: U6.1@2527.24,3778.82 2514.13,3778.82 2478.31,3743 2322,3743 2291.76,3773.24 2291.76,4061.76 2460,4230 2540,4230 2590,4280 v2(2727.72,4280) ; v2(2870,4255) 2895,4230 2895,4160 2936,4119 2986,4119 3076,4029 3478.5,4029 3534.5,4085 3534.5,4129.5 3560,4155 3560,4190 v3(3530,4220) ; v1(4724,4282) 4750,4282 4848.8,4183.2 U1.70@4959.23,4183.2
RADIO_IRQ: U1.24 U6.6 | length 2835.2
  Top Layer w8: v1(3562,4266) 3599,4303 3705,4303 3821,4419 3879,4419 4008,4548 4037,4548 4040,4551 v1(4240,4551)
  Bottom Layer w8: U6.6@2565.63,3895.95 2565.63,3939.37 2550,3955 2445,3955 2410,3990 2410,4125 2480,4195 2575,4195 2604,4224 2718.72,4224 2781.65,4161.06 2816.06,4161.06 2980.12,3997 3522,3997 3590,4065 3590,4195 3562,4223 v1(3562,4266) ; v1(4240,4551) 4291.54,4551 4305,4537.54 U1.24@4362.77,4537.54
RESET: J1.10 J4.18 J10.3 R11.1 R63.1 T_RST1.1 U4.10 U7.3 | length 7462.8
  Top Layer w8: v1(3626.25,4605) 3626.25,4646.25 3780,4800 4091.72,4800 4098.72,4807 v1(4167,4807) ; v1@4174,4808 4329,4808 4400.5,4736.5 4540.5,4736.5 4603,4799 4756.86,4799 4858.86,4901 5044,4901 5164,4781 5164,4351 5150,4337 v2(5150,4330) 5150,4070 5330,3890 v1(5565,3890) ; v1(4841,3649) 5081,3649 v1@5168,3562 ; J1.10@5330.13,3287.87 v1(5398,3256) ; T_RST1.1@5370,3170 5400,3200 v1@5400,3253 ; J10.3@5500,4100 5631,4100 v1(5666,4065)
  Bottom Layer w8: U7.3@3137.57,4565.1 3102.09,4565.1 3093.09,4556.1 3093.09,4490.09 3075.53,4472.53 3075.53,4324.77 3062.5,4311.75 3062.5,4179.15 3132.37,4109.28 3281,4109.28 3299,4127.28 3299,4227.94 3314.22,4243.16 3331.47,4243.16 3345.56,4257.25 3462.25,4257.25 3623,4418 v1@3623,4601.75 ; J4.18@4100,5189.98 4100,5120 4111.5,5108.5 4130.22,5108.5 4148,5090.72 4148,4984.37 4123,4959.37 4123,4896.25 4167,4852.25 v1@4167,4819 ; v1(4841,3649) U4.10@4923,3649 ; U4.10@4893.66,3648.98 U4.10@4947.02,3648.98 ; R63.1@5149.53,4285 5150,4285.47 v2(5150,4330) ; v1@5170,3564 5170,3700.72 5233.59,3764.31 5397.31,3764.31 5523,3890 v1(5565,3890) ; v1(5398,3256) 5423.63,3256 5535,3367.37 5535,3459 5661,3585 5661,3680.47 ; v1@5566,3890 5670,3890 ; R11.1@5570,3680.47 5661,3680.47 ; v1(5666,4065) 5666,4039 5675,4030 5675,3791.56 5661,3777.56 5661,3680.47
  other v1: 5170,3562
RIGHT: C43.2 R55.1 U7.39 | length 141.7
  Bottom Layer w8: U7.39@3366.9,4473.57 3366.9,4390 3374.44,4382.46 C43.2@3374.44,4335
RIGHT_OUT: C43.1 R52.1 | length 44.7
  Bottom Layer w8: C43.1@3429.56,4335 3430,4334.56 R52.1@3430,4290.53
SPI_CLK: J4.9 J7.5 J10.4 R64.1 U6.3 U7.28 | length 7226.4
  Top Layer w8: v3(2390,3800) 2390,4042.63 2426.57,4079.2 J7.5@2426.57,4158.98 2425,4160.55 v3(2425,4250) ; v3(2540,4915) 2540,4950 2555,4965 2600,4965 2691,5056 2691,5131.25 2706,5146.25 2706,5274 2949,5517 3076.75,5517 3365.75,5806 3742.72,5806 v1(3828.72,5720) ; v1(3621,5015) 3658,4978 v1(3908,4978) ; v1(3900,5429) 3900,5093 3908,5085 v1(3908,5066) ; v1@3913,4973 4375,4973 4382,4980 v2(4490,4980) 4555,4980 4561.5,4973.5 4648.5,4973.5 4705,5030 5099.39,5030 5136.39,4993 v1@5159.5,4993 ; v1(5214,4841) 5214,4730 5180,4696 5180,4226 5306,4100 J10.4@5400,4100
  Bottom Layer w8: v3(2390,3800) 2415,3775 2456.72,3775 2499.91,3818.19 U6.3@2527.24,3818.19 ; v3(2425,4250) 2425,4321.06 2449.19,4345.25 2450.25,4345.25 2540,4435 v3(2540,4915) ; U7.28@3458.43,4683.21 3548.21,4683.21 3570,4705 3570,4924.04 3550.5,4943.54 3550.5,4972.22 3593.28,5015 v1(3621,5015) ; v1(3828.72,5720) 3900,5648.72 v1(3900,5429) J4.9@3900,5350.02 ; v1@3908,4989 v1(3908,5066) ; R64.1@4450,4944.53 4454.53,4944.53 v2(4490,4980) ; v1@5161,4992 5214,4939 v1(5214,4841)
  other v1: 5161,4993
SPI_MISO: J4.5 J7.7 J10.6 R2.1 R67.2 U1.30 U7.30 | length 7172.6
  Top Layer w8: v2(2335,3860) 2333.56,3860 2333.56,4108.56 2340,4115 2340,4158.94 J7.7@2339.96,4158.98 J7.7@2339.96,4158.98 v3(2340,4220) ; v3(2670,4950) 2709.5,4950 2726,4966.5 2726,5118.37 2738,5130.37 2738,5260.75 2962.25,5485 3090,5485 3365,5760 3595,5760 v1@3605,5750 ; v1(3625,4810) 3650,4835 4037,4835 4061,4859 4091.72,4859 4179.35,4859 4188.85,4849.5 4385.22,4849.5 4400.72,4865 4477.37,4865 4497.37,4845 v1(4512,4845) ; v1(3655.5,5084.5) 3800,5229 v1(3800,5426) ; v1@4500,4842 v1@4512,4842 ; v1@4516,4845 4551,4845 4569,4863 4730.35,4863 4832.35,4965 5073.88,4965 5134.88,4904 5281.97,4904 5321,4864.97 5321,4744.88 5277.5,4701.38 5277.5,4322.5 J10.6@5400,4200
  Bottom Layer w8: v2(2335,3860) 2335,3861.92 2338.08,3865 2360,3865 R67.2@2405.47,3865 ; v3(2340,4220) 2335,4225 R2.1@2335,4265.47 2495,4425.47 2495,4920 2525,4950 v3(2670,4950) ; U7.30@3458.43,4643.84 3578.84,4643.84 3623,4688 v1@3623,4808 ; v1(3606,5758) 3620.5,5743.5 3740.87,5743.5 3800,5684.37 v1(3800,5426) J4.5@3800,5350.02 ; v1(3625,4810) 3615.07,4819.93 3615.07,4955.07 3655.5,4995.5 v1(3655.5,5084.5) ; U1.30@4503.28,4619.46 v1@4503.28,4832.28
SPI_MOSI: J4.7 J7.3 J10.8 R1.1 U1.31 U6.4 U7.29 | length 7507.5
  Top Layer w8: v3(2445,3805) 2406,3844 2406,4036 2513.19,4143.19 J7.3@2513.19,4158.98 2513.19,4211.18 2480,4244.37 v2(2480,4270) ; v3(2625,4915) 2625,4965 2710,5050 2710,5125 2722,5137 2722,5267.37 2955.63,5501 3083.37,5501 3372.37,5790 3665,5790 v1(3682,5773) ; v1(3850,5427) 3850,5066 3834,5050 3610,5050 3580,5020 v1(3580,4960) 3712,4960 3755,4917 4100,4917 4123,4940 4190.72,4940 4218.72,4912 v1@4520,4912 ; v1@4525,4915 4540,4900 4722.09,4900 4820.09,4998 5086.14,4998 5148.14,4936 5295.23,4936 5388.5,4842.73 5388.5,4768.13 5362.37,4742 5340.75,4742 5293.5,4694.75 5293.5,4406.5 J10.8@5400,4300
  Bottom Layer w8: v3(2445,3805) 2445,3810 2460,3825 2480,3825 2492.87,3837.87 U6.4@2527.24,3837.87 ; v2(2480,4270) 2480.47,4270.47 R1.1@2515,4270.47 2550.47,4270.47 2580,4300 2580,4546.5 2623.5,4590 2623.5,4913.5 v3(2625,4915) ; U7.29@3458.43,4663.53 3563.53,4663.53 3586,4686 v1@3586,4954 ; v1@3685,5772 3735,5772 3850,5657 v1(3850,5427) J4.7@3850,5350.02 ; v1(4522,4919) 4543.5,4897.5 4543.5,4830.78 4519.28,4806.56 4519.28,4680.09 4523.2,4676.17 U1.31@4523.2,4619.23
SPI_SEL_A: U1.29 U2.1 | length 726.2
  Bottom Layer w8: U1.29@4482.5,4620.56 4482.5,4929.78 4556,5003.28 4556,5142 4621.57,5207.57 U2.1@4703.2,5207.57
SPI_SEL_AUDIO_SCI: U2.12 U7.23 | length 2192.2
  Top Layer w8: v1(3635,5440) 3690,5495 4363,5495 4469,5389 4469,5372 v1@4541,5300
  Bottom Layer w8: U7.23@3386.58,4794.43 3386.58,4831.58 3425,4870 3475,4870 3510,4905 3510,5315 v1(3635,5440) ; U2.12@4507.34,5105.2 4426.8,5105.2 4381,5151 4381,5200 4410,5229 4444,5229 4513,5298 v1(4541,5298)
SPI_SEL_AUDIO_SDI: U2.11 U7.13 | length 2644.4
  Top Layer w8: v1(3520,5440) 3606,5526 4357,5526 v1@4540.5,5342.5
  Bottom Layer w8: U7.13@3189.73,4794.43 3165.57,4794.43 3125,4835 3125,5055 3177.5,5107.5 3441.54,5107.5 3475,5140.96 3475,5395 v1(3520,5440) ; U2.11@4507.34,5079.61 4429.76,5079.61 4365,5144.37 4365,5288 4419,5342 4526,5342 v1@4534,5350
  other v1: 4541,5343
SPI_SEL_B: U1.34 U2.2 | length 687.7
  Bottom Layer w8: U1.34@4582.26,4619.23 4582.26,4671.26 4602.5,4691.5 4602.5,4954.15 4572,4984.65 4572,5135.37 4618.6,5181.98 U2.2@4703.2,5181.98
SPI_SEL_C: U1.35 U2.3 | length 627.1
  Bottom Layer w8: U1.35@4601.94,4619.23 4601.94,4668.32 4618.5,4684.87 4618.5,4960.78 4588,4991.28 4588,5128.75 4615.64,5156.39 U2.3@4674.66,5156.39
SPI_SEL_EXPAND0: J10.10 U2.9 | length 1976.3
  Top Layer w8: v1@4385,4882 4726.72,4882 4825.72,4981 5080.51,4981 5141.51,4920 5288.6,4920 5359,4849.6 v1(5359,4781) ; J10.10@5400,4400 5360,4400 5309.5,4450.5 5309.5,4688.13 5347.37,4726 5392.37,4726 5419,4752.63 v1(5419,4781)
  Bottom Layer w8: v1(4376,4882) 4376,5006 4398.43,5028.43 U2.9@4478.8,5028.43 U2.9@4507.34,5028.43 ; v1(5359,4781) v1(5419,4781)
SPI_SEL_EXPAND1: U2.7 | length 145.7
  Bottom Layer w8: U2.7@4674.66,5054.02 4755.98,5054.02 4780,5030 v1(4780,4999.63)
SPI_SEL_MSP430: J4.3 U2.14 | length 1142.7
  Top Layer w8: v1(3751,5427) 3751,5451 3772,5472 4350,5472 4419,5403 4419,5376 4512.5,5282.5 4512.5,5232.5 v1@4545,5200
  Bottom Layer w8: J4.3@3750,5350.02 v1@3750,5427 ; U2.14@4507.34,5156.39 4541.39,5156.39 4550,5165 v1(4550,5200)
SPI_SEL_OE: R6.2 U1.19 U2.6 | length 1797.3
  Top Layer w8: v1@4043,4435 4088,4480 4175,4480 v1(4230,4425) ; v1@4090,4731 4383.37,4731 4393.87,4720.5 4547.13,4720.5 4609.63,4783 4651,4783 v1(4666,4768)
  Bottom Layer w8: v1@4043,4437 4073,4467 4073,4708 v1@4087,4722 ; v1@4229,4429 4306,4429 4314.33,4437.33 U1.19@4360.99,4437.33 ; v1@4665,4768 4665,4952 4678,4965 4787.09,4965 4809.5,4987.41 4809.5,5055.5 R6.2@4789.5,5075.5 ; U2.6@4703.2,5079.61 R6.2@4781.39,5079.61
  other v1: 4043,4433 4087,4731
SPI_SEL_RADIO: U2.13 U6.2 | length 3946.6
  Top Layer w8: v2(2760,4240) 2765,4245 2830,4245 2865,4210 v2(2865,4205) ; v2(3560,4110) 3566,4110 3610,4154 3635.63,4154 3656.13,4174.5 v1(3835.5,4174.5) ; v1@3905,4658 v1(4295,4658)
  Bottom Layer w8: U6.2@2527.24,3798.5 2511.19,3798.5 2471.68,3759 2331,3759 2307.76,3782.24 2307.76,4047.76 2471.18,4211.18 2556.18,4211.18 2585,4240 v2(2760,4240) ; v2(2865,4205) 2865,4155 2918,4102 2968,4102 3057,4013 3513,4013 3560,4060 v2(3560,4110) ; v1(3835.5,4174.5) 3860,4199 3860,4235 3883,4258 3883,4642 v1@3895.49,4654.49 ; v1@4309,4658 4366,4658 4384.5,4676.5 4384.5,4709.22 4366,4727.72 4366,4830.28 4407,4871.28 4407,4992 4422.76,5007.76 4522.76,5007.76 4540,5025 4540,5130 ; U2.13@4507.34,5130.8 4539.2,5130.8
  other v1: 3901,4660
SPI_SEL_SD: J7.2 U2.10 | length 2918.7
  Top Layer w8: J7.2@2556.49,4158.98 2556.49,4211.49 2665,4320 v2(2890,4320) ; v1(3564,4317) 3701,4454 3701,4609.72 3736.78,4645.5 3833.5,4645.5 3885,4697 v1(4346,4697)
  Bottom Layer w8: v2(2890,4320) 2932.13,4277.87 2932.13,4172.87 2950.5,4154.5 3010.5,4154.5 3103.72,4061.28 3348.91,4061.28 3399.63,4112 3425,4112 3449,4136 3449,4202 v1(3564,4317) ; v1@4346,4706 4346,5011 4389.02,5054.02 U2.10@4478.8,5054.02 ; U2.10@4478.8,5053 U2.10@4493,5053
SW_BLUE: R46.1 SW4.3 U1.59 | length 2015.5
  Top Layer w8: SW4.3@4660,3044 R46.1@4720.24,2983.76 ; SW4.3@4666,3044 4716,3044 4740,3068 4740,3230 v1(4780,3270)
  Bottom Layer w8: v1(4780,3270) 4851.35,3270 5111,3529.65 5111,3689.63 5224.9,3803.52 5224.87,3804.45 5224,3834.32 ; U1.59@4959.23,4399.74 5185.26,4399.74 5224,4361 5224,3834.32 ; 5224,3804.42 5224,3834.32
SW_GREEN: R45.1 SW3.3 U1.60 | length 2932.3
  Top Layer w8: SW3.3@3910,3047 v1(3910,3093) ; SW3.3@3911,3047 3958,3047 3971.47,3033.53 R45.1@3971.47,2981 ; v1@4242,3508 4409.37,3508 4433.37,3484 4648,3484 4690,3442 v1(4690,3420)
  Bottom Layer w8: v1@3909.5,3093.5 3960,3144 4171,3144 4270,3243 4270,3490 v1@4252,3508 ; v1(4690,3420) 4978.72,3420 5095,3536.28 5095,3734 5208,3847 5208,4347 5172.16,4382.84 5011.91,4382.84 5009.12,4380.06 U1.60@4959.23,4380.06
  other v1: 4240,3510
SW_RED: R44.1 SW2.3 T_SW_R1.1 U1.61 | length 4157.1
  Top Layer w8: SW2.3@3157,3041 R44.1@3210.47,2987.53 ; SW2.3@3160,3044 v1(3160,3091) ; v1@3161,3092 3182,3113 v1@3296,3113 ; v1@4185,2974 v1(4566,2974) ; v1(5046,3617) 5108,3555 5108,3267 5119,3256 v1(5119,3122) T_SW_R1.1@5163,3122
  Bottom Layer w8: v1@3295,3109 3295,3011 3411,2895 3593.28,2895 3617.78,2870.5 3642.22,2870.5 3666.72,2895 4003,2895 4083,2975 v1(4185,2975) ; v1(4566,2974) 4748.5,2791.5 4806.5,2791.5 4830,2815 4830,2886.6 5066.4,3123 v1@5119,3123 ; U1.61@4959.23,4360.37 5012.06,4360.37 5018.53,4366.84 5165,4366.84 5192,4339.84 5192,3887.75 5030,3725.75 5030,3633 v1(5046,3617)
  other v1: 3296,3112
USB_CTS: U1.22 U3.11 | length 2182.4
  Top Layer w8: v1@4162.5,3887.5 4172.5,3887.5 4225,3835 4260,3835 4305,3790 v1(4305,3715)
  Bottom Layer w8: U3.11@4079.57,2774.45 4079.57,2823.57 4095,2839 4161.37,2839 4353,3030.63 4353,3644.63 4305,3692.63 v1(4305,3715) ; v1(4165,3890) 4196,3921 4196,4244 4140,4300 4140,4370 4200,4430 4200,4464.28 4233.89,4498.17 U1.22@4362.77,4498.17
USBDM: J3.2 R59.2 | length 700.5
  Top Layer w8: v1@3635,2251 J3.2@3654.07,2340.96
  Bottom Layer w8: v1(3632,2248) 3632,2322 3700,2390 ; 3701,2391 4075.63,2391 4086.16,2380.47 R59.2@4135,2380.47
USBDP: J3.3 R58.2 | length 794.5
  Top Layer w8: v1@3671,2269 J3.3@3685,2335
  Bottom Layer w8: v1@3674,2262 3674,2341.37 3707.63,2375 4069,2375 4124,2320 4210,2320 4245,2355 R58.2@4245,2380.47
  other v1: 3677,2261
VBAT: C49.2 D2.1 J4.21 J10.9 R51.2 T_VBAT1.1 U8.6 | length 8181.6
  Top Layer w8: D2.1@4334.47,2604 4316,2604 4305,2615 4305,2855 4325,2875 4400,2875 4413.5,2888.5 4551.5,2888.5 v1(4645,2795) ; T_VBAT1.1@4871,5255 4871,5129 4895,5105 4895,5060
  Top Layer w15: v2(2716,4630) 2716.47,4629.53 v3(2834.53,4629.53) 2834.53,4545.47 2850,4530 2895,4530 2917.5,4507.5 ; v1(3410,5450) 3545,5585 v1(4175,5585) ; v1(4200,5427) 4567,5060 4895,5060 v1@5238,5060 ; J10.9@5500,4400 5500,4500 5544,4544 5544,4545 ; v1(5503,4741) 5503,4586 5544,4545 ; v1(5740,4240) 5740,4349 5544,4545
  Bottom Layer w8: v1(4645,2795) 4664.5,2775.5 4813.13,2775.5 4846,2808.37 4846,2879.97 5036.53,3070.5 5168.78,3070.5 5278.28,3180 5395,3180 5590,3375 5665,3375 5761.5,3471.5 5761.5,3723.22 5740,3744.72 v1(5740,4240)
  Bottom Layer w15: v2@2720,4630 2720,4825.05 3249.95,5355 3315,5355 v1(3410,5450) ; v3(2834.53,4629.53) R51.2@2880,4629.53 ; v2@2925.01,4500 C49.2@2965.31,4500 2977.2,4488.11 U8.6@2977.2,4439.57 ; v2@2928.56,4498.56 v2(2930,4500) ; v1(4175,5585) 4202,5558 v1@4202,5429 ; v1@5238.04,5057 5261,5058 5280,5039 5280,4961.82 5397.82,4844 ; 5398.67,4844 5420.67,4822 5458,4822 5503,4777 v1(5503,4741)
  Bottom Layer w20: J4.21@4200,5350.02 v1(4200,5427)
  other v1: 5238,5058
VDD25: C3.2 C4.2 U1.7 U1.14 U1.38 U1.62 U1.88 | length 1963.2
  Top Layer w8: v1(4449,4340) 4495,4340 4511,4356 v1@4764,4356
  Bottom Layer w8: C3.2@4278.31,4340.69 v1@4446.69,4340.69 ; U1.7@4362.77,4202.89 4427.17,4202.89 4430.78,4206.5 4455.5,4206.5 4537,4288 4537,4373 4584.5,4420.5 4661,4420.5 ; U1.88@4661,4022.77 4661,4122.33 4636,4147.33 4636,4296.44 4661,4321.44 4661,4420.5 ; 4661,4464 U1.38@4661,4619.23 ; 4661.5,4463.5 4756,4369 v1@4756,4359 ; 4704,4420.5 4661,4420.5 ; v1@4767,4361 4835,4361 4855.31,4340.69 C4.2@5033.31,4340.69
  other v1: 4767,4359
VDD_AUDIO: C35.1 C36.2 L5.1 U7.38 U7.43 U7.45 | length 651
  Bottom Layer w8: U7.45@3248.79,4473.57 3248.79,4518.79 3288.16,4558.16 ; C36.2@3288.16,4395.15 U7.43@3288.16,4473.57 3288.16,4558.16 ; C35.1@3498,4422 3402.68,4422 3386.58,4438.09 3386.58,4513.42 3359.5,4540.5 3359.5,4557.22 3339.88,4576.84 3306.84,4576.84 3288.16,4558.16 ; C35.1@3505,4422.44 L5.1@3556.44,4422.44
pads on no net: D10.2 D10.3 D11.2 D11.3 D12.2 D12.3 D13.2 D13.3 H1.1 H2.1 H3.1 H4.1 J1.7 J4.c1 J4.c2 J7. J7.1 J7.8 J8.1 J9.1 SW1.1 SW1.4 SW2.1 SW2.4 SW3.1 SW3.4 SW4.1 SW4.4 U1.16 U1.17 U1.37 U1.40 U1.43 U1.46 U1.51 U1.52 U1.53 U1.55 U2.15 U3.2 U3.3 U3.6 U3.8 U3.9 U3.10 U3.12 U3.13 U3.14 U3.24 U3.27 U3.28 U4.9 U5.12 U5.13 U5.28 U5.29 U7.15 U7.27 U7.48 U9.4 U9.5

## Polygon pours and split planes (outlines as drawn)
GND on Top Layer "Component Side-No Net" (solid, pour order 37): 2240.14,4240 2240.14,3470.14 2240,3470 2241.01,3471.01 3837,3471.01 3837,4232 3845,4240
GND on Top Layer "Gnd" (solid, pour order 11): 3810,3170 3810,3349 3837,3376 3837,3640 3306,3640 3307,3639 3307,3385 3385,3385 3450,3335 3450,3210 3492,3170
GND on Top Layer "Top Layer-GND" (solid, pour order 13): 3550,4595 3550,5135 3370,5315 3135,5315 3095,5275 3095,5230 2900,5035 2825,5035 2790,5000 2790,4675 2825,4640 2915,4640 2915,4760 3030,4760 3070,4720 3070,4595
GND on Top Layer "PowerSupplyGnd" (solid, pour order 16): 4779,4899 5142,4898 5142,4616 5111,4585 4835,4585 4835,4652 4779,4708
GND on Top Layer "Top Layer-GND" (solid, pour order 14): 3085,4075 3450,4075 3500,4125 3500,4325 3550,4375 3575,4375 3600,4400 3600,4575 3059.53,4575 3060,4715 3025,4750 2925,4750 2925,4235
GND on Bottom Layer "Component Side-No Net" (solid, pour order 45): 2900,3953.7 2900,3711.72 2905,3705 2906.31,3706.76 2945,3706.76 2945,3953.7
GND on Bottom Layer "Component Side-No Net" (solid, pour order 39): 2692.9,3975 2695,3972.9 2695,3930 2667.48,3930 2660,3922.52 2660,3875 2695,3875 2740,3875 2740,3964.59 2744.01,3968.6
GND on Bottom Layer "Component Side-No Net" (solid, pour order 35): 2945,3765 2914.13,3735 2914.13,3715 2723.77,3715 2718.62,3720 2708.33,3710 2708.33,3640 2641.45,3640 2641.45,3700 2523.12,3700 2517.97,3695 2515.14,3697.76 2515.14,3857.56 2515.14,3862.24 2574.57,3920 2600.29,3945 2600.29,4045 2600.29,4065 2595.14,4070 2590,4075 2470.41,4075 2470.41,4136.22 2466.52,4140 2471.67,4145 2631.16,4145 2631.16,4090 2641.45,4080 2662.68,4059.37 2736.85,4059.37 2736.85,3987.28 2739.2,3985 2728.91,3975 2692.9,3975 2692.9,3945 2698.04,3940 2826.67,3940 2826.67,3880 2831.81,3875 2934.71,3875 2934.71,4210 2903.84,4240 2240.14,4240 2240.14,3510 2235,3505 2271.01,3470 2945,3470

## Other copper
Top Layer:
  region net 3.3V: 4633.09,3339.88 4625,3334 4654.39,3293.55 4662.48,3299.43
  region net 3.3V: 4925,3304 4916.91,3309.88 4887.52,3269.43 4895.61,3263.55
  region net 3.3V: 4502.45,3083.55 4505.54,3074.04 4553.09,3089.49 4550,3099
  region net 3.3V: 4974.46,3014.04 4977.55,3023.55 4930,3039 4926.91,3029.49
  rectangle net 3.3V: 4715,2874 4725,2924
  region net 3.3V: 3133.09,3339.88 3125,3334 3154.39,3293.55 3162.48,3299.43
  region net 3.3V: 3425,3304 3416.91,3309.88 3387.52,3269.43 3395.61,3263.55
  region net 3.3V: 3474.46,3014.04 3477.55,3023.55 3430,3039 3426.91,3029.49
  region net 3.3V: 3005.45,3056.55 3008.54,3047.04 3056.09,3062.49 3053,3072
  rectangle net 3.3V: 3215,2874 3225,2924
  region net 3.3V: 3752.45,3086.55 3755.54,3077.04 3803.09,3092.49 3800,3102
  region net 3.3V: 3883.09,3342.88 3875,3337 3904.39,3296.55 3912.48,3302.43
  region net 3.3V: 4175,3307 4166.91,3312.88 4137.52,3272.43 4145.61,3266.55
  region net 3.3V: 4224.46,3017.04 4227.55,3026.55 4180,3042 4176.91,3032.49
Bottom Layer:
  rectangle net GND: 2575,3785 2650,3845

## Silkscreen, mask and mechanical layers (free items; w line width, h text height)
Top Overlay:
  drawing of 48 lines, arcs and shapes, not listed
  text "T0" at 3655,5855 h30
  text "GND" at 4110,5715 h45
  text "3.3V" at 4325,5715 h45
  text "IR0" at 3070,5500 h30
  text "GND" at 4710,5445 h40
  text "3.3V" at 4675,5345 h40
  text "VBAT" at 4660,5230 h45
  text "FL" at 2685,5005 h30
  text "FR" at 5415,4900 h80
  text "FL" at 2475,4895 h80
  text "FR" at 5650,4875 h30
  text "PWM0A" at 4480,4490 h45
  text "QEI0A" at 3875,4425 h45
  text "QEI0B" at 4135,4425 h45
  text "PWM0B" at 4480,4420 h45
  text "IR" at 3965,4285 h60
  text "Beacon" at 3830,4210 h60
  text "Micro SD" at 2165,4140 h45 r90
  text "Expansion" at 5636,3949 h60 r90
  text "r-one-v14.0" at 4190,3760 h41
  text "JTAG" at 5305,3720 h80 r335
  text "R" at 3200,3400 h80
  text "G" at 3940,3400 h80
  text "B" at 4735,3380 h80
  text "SW_R" at 5050,3155 h30
  text "RST" at 5410,3140 h50
  text "BL" at 2455,3030 h80
  text "BR" at 5410,3025 h80
  text "RX" at 5340,2980 h50 r90
  text "TX" at 5265,2935 h50 r90
  text "RX" at 3725,2590 h50 r79.1
  text "TX" at 3790,2575 h50 r79.1
  text "IR4" at 4825,2495 h30
  text "T4" at 4225,2195 h30
  text "Waste Area to be routed off after assembly" at 2897,1779 h60
Bottom Overlay:
  text "8962-CPU" at 4381,4603 h45
Mechanical 1:
  lines w5: 2000,4000 6000,4000 ; 4000,2000 4000,6000
Fabrication Drawing:
  lines w9: 7190,5634.5 12440,5634.5 ; 7190,5803.4 12440,5803.4 ; 7130,3945 ccw(c7185,3945) 7185,3890 12445,3890 ccw(c12445,3945) 12500,3945 12500,6445 ccw(c12445,6445) 12445,6500 7185,6500 ccw(c7185,6445) 7130,6445 7130,3945
  text "Layer Stack Up Detail for: roneCPUBoard-v15a.PcbDoc" at 7190,6075.4 h101
  text "Layer" at 7190,5740.4 h39
  text "Gerber" at 8247.7,5740.4 h39
  text "Copper" at 8772.57,5740.4 h39
  text "Dielectric" at 9361.12,5740.4 h39
  text "Dielectric" at 9976.96,5740.4 h39
  text "Dielectric" at 11080.48,5740.4 h39
  text "Dielectric" at 11696.32,5740.4 h39
  text "Name" at 7190,5662.4 h39
  text "Document" at 8247.7,5662.4 h39
  text "Thickness" at 8772.57,5662.4 h39
  text "Height" at 9361.12,5662.4 h39
  text "Material" at 9976.96,5662.4 h39
  text "Constant" at 11080.48,5662.4 h39
  text "Type" at 11696.32,5662.4 h39
  text "Top Solder Mask" at 7190,5437.5 h55
  text "(.GTS)" at 8247.7,5437.5 h55
  text "0.4mil" at 9361.12,5437.5 h55
  text "Black Solder Resist" at 9976.96,5437.5 h55
  text "3.50" at 11080.48,5437.5 h55
  text "Top Layer" at 7190,5052.5 h55
  text "(.GTL)" at 8247.7,5052.5 h55
  text "1.4mil" at 8772.57,5052.5 h55
  text "58.4mil" at 9361.12,4860 h55
  text "FR-4" at 9976.96,4860 h55
  text "4.80" at 11080.48,4860 h55
  text "Core" at 11696.32,4860 h55
  text "Bottom Layer" at 7190,4667.5 h55
  text "(.GBL)" at 8247.7,4667.5 h55
  text "1.4mil" at 8772.57,4667.5 h55
  text "Bottom Solder Mask" at 7190,4282.5 h55
  text "(.GBS)" at 8247.7,4282.5 h55
  text "0.4mil" at 9361.12,4282.5 h55
  text "Black Solder Resist" at 9976.96,4282.5 h55
  text "3.50" at 11080.48,4282.5 h55
  text "FR4 0.062\"" at 7195,3750 h60
  text "ENIG or Silver Immersion Pad Finish" at 7175,3600 h60
Design Information:
  text "IPC Class II Assembly" at 3460,1485 h60
Board Outline:
  lines w8: 5539,2790 5420,2790 5420,2652 cw(c4000,4000) 2580,2652 2580,2790 2461,2790 cw(c4000,4000) 2460.99,5209.99 2580,5210 2580,5348 cw(c4000,4000) 5420,5348 5420,5210 5539,5210 ; 5539.18,5210.14 cw(c4000,4000) 5539.56,2790.35
Drill Drawing:
  text ".Legend" at 7611,1614 h60
Board Panel:
  lines w8: 1943.43,4120.19 ccw(c1983.62,4120.19) 1983.62,4080 ; 1944,4120.19 1944,5048 2950,6054 ; 1946.34,2950 1946.34,3879.81 ; 1946.42,3878 cw(c1986.61,3878) 1986.61,3918.19 ; 1947,2950 2953,1944 3879.81,1944 ; 1985.62,4080 2016.43,4080 ccw(c2016.43,4111) 2044.93,4098.79 ; 1986.61,3918 2015,3918 ; 2016,3918 cw(c2016,3887) 2044.49,3899.21 ; 2044.79,4098.95 cw(c4000,4000) 2460.99,5209.99 2580,5210 2580,5348 cw(c4000,4000) 3900.17,5955.39 ; 2044.85,3899.99 ccw(c4000,4000) 2460.99,2790.01 2580,2790 2580,2652 ccw(c4000,4000) 3901.19,2044.56 ; 2950,6054.66 3879.81,6054.66 ; 3879.81,1944.81 ccw(c3879.81,1985) 3920,1985 ; 3879.81,6054.46 cw(c3879.81,6014.27) 3920,6014.27 ; 3900.18,5954.52 ccw(c3887.23,5984.73) 3920.1,5984.73 ; 3901.21,2044.93 cw(c3889,2016.43) 3920,2016.43 ; 3910.08,5954.37 3910.22,5954.43 ; 3920,1981.62 3920,2015 ; 3920,5984.73 3920,6015.27 ; 4079.8,2016.08 cw(c4113,2016.08) 4099.92,2046.59 ; 4080,1985 ccw(c4120.19,1985) 4120.19,1944.81 ; 4080,1985.61 4080,2015 ; 4080,5981.43 4080,6014.81 cw(c4120.19,6014.81) 4120.19,6055 ; 4080,5982 ccw(c4111,5982) 4098.79,5953.51 ; 4098.89,5955.43 cw(c4000,4000) 5420,5348 5420,5210 5539,5210 ; 4100.02,2044.62 ccw(c4000,4000) 5420,2652 5420,2790 5539,2790 ; 4120.19,1944.34 5050,1944.34 ; 4120.19,6056 5048,6056 6054,5050 ; 5050,1945 6056,2951 6056,3895 ; 5539.18,5210.14 cw(c4000,4000) 5955.39,4099.76 ; 5539.53,2790.68 ccw(c3999.44,3999.65) 5954.9,3901.22 ; 5954.29,4099.92 ccw(c5984.81,4113) 5984.81,4079.8 ; 5955.07,3901.21 cw(c5983.57,3889) 5983.57,3920 ; 5985,3920 6018.38,3920 cw(c6018.38,3879.81) 6058.57,3879.81 ; 5985.81,4080 6014.19,4080 ccw(c6014.19,4120.19) 6054.38,4120.19 ; 6054.66,4120.19 6054.66,5050 ; 1690,1690 6310,1690 6310,6310 1690,6310 1690,1690

## Dimensions
6310,6310 to 1690,6310 on Fabrication Drawing
6310,6310 to 6310,1690 on Fabrication Drawing